# Altium PCB 175-00023, rev2, PCB, Sinistro Pwr Supply.PcbDoc (part 1 of 2)
Units mm, origin at the board's own origin, x right, y up, seen from the top; angles counter-clockwise.
Board outline 210 x 100 mm, 5 copper layers (TopLayer (*.GTL), MidLayer1 (*.G1), AGND (*.GP1), GND (*.GP2), BottomLayer (*GBL)); 99 components, 65 nets, 412 pads, 73 vias.
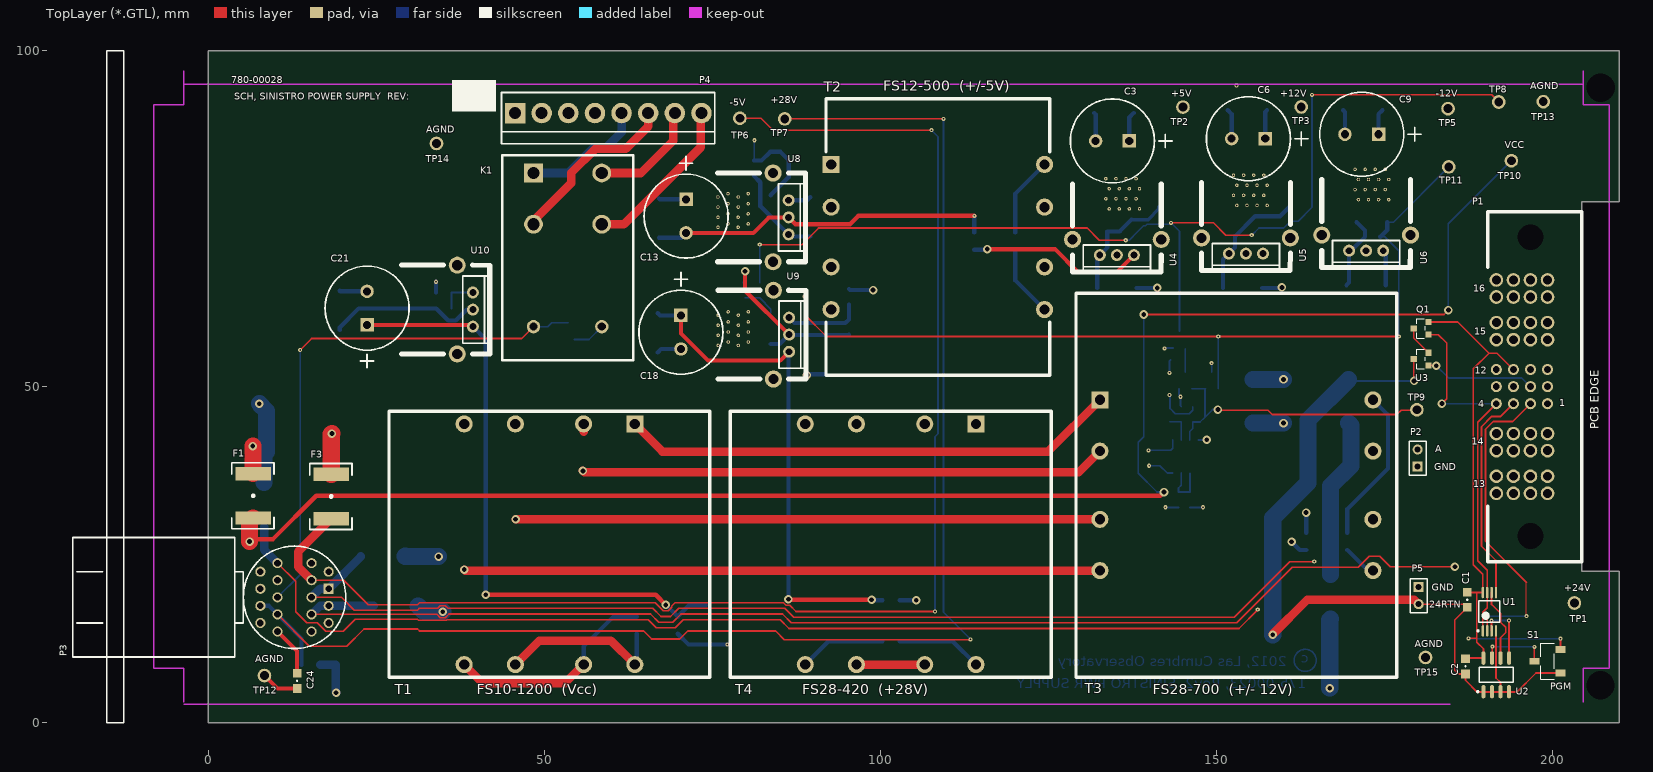
[diagram p0: TopLayer (*.GTL) view]
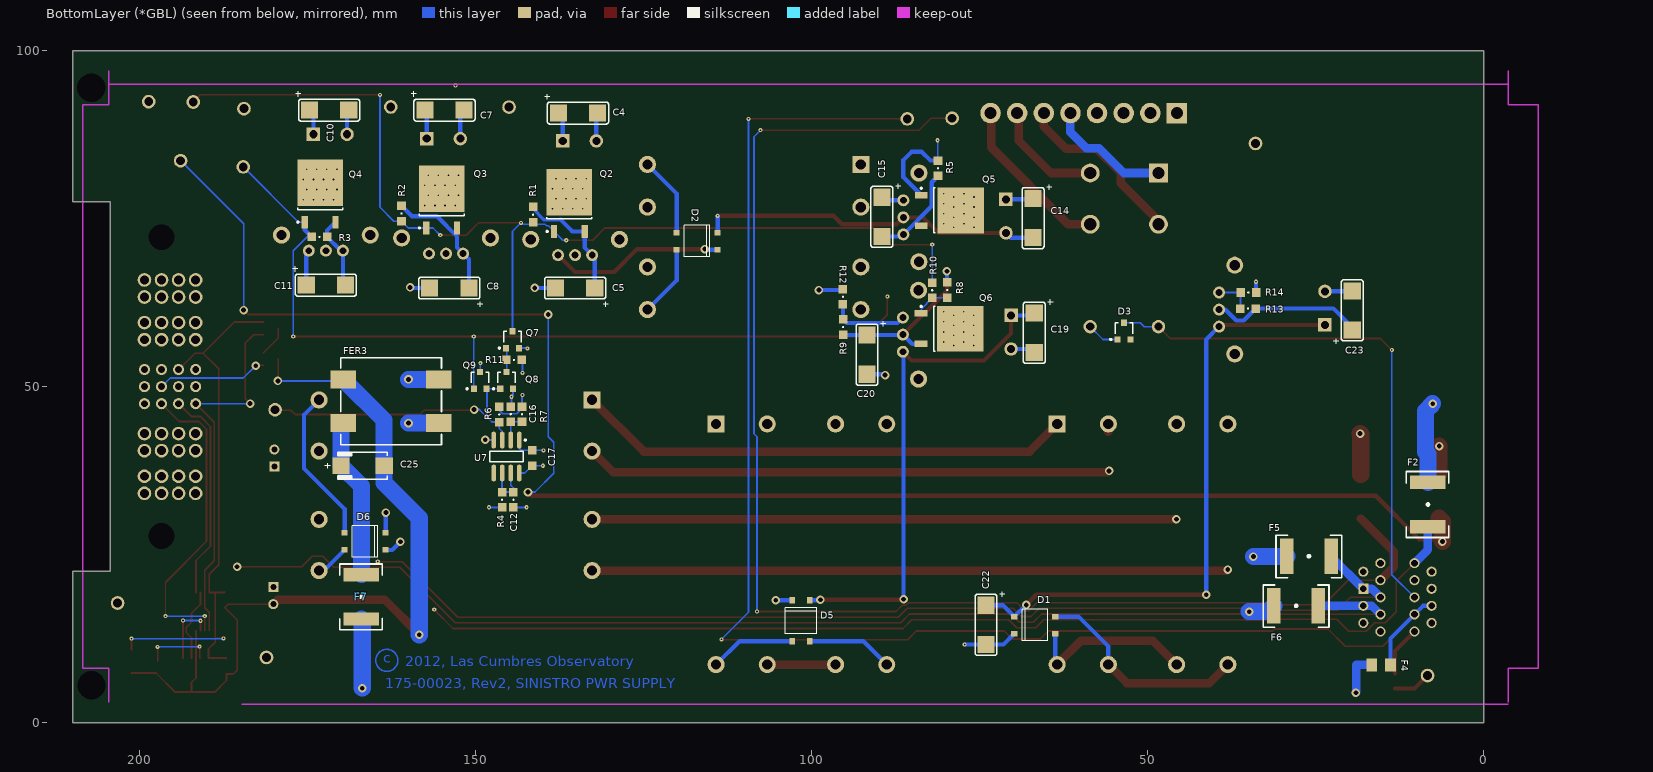
[diagram p1: BottomLayer (*GBL) view, seen from below]
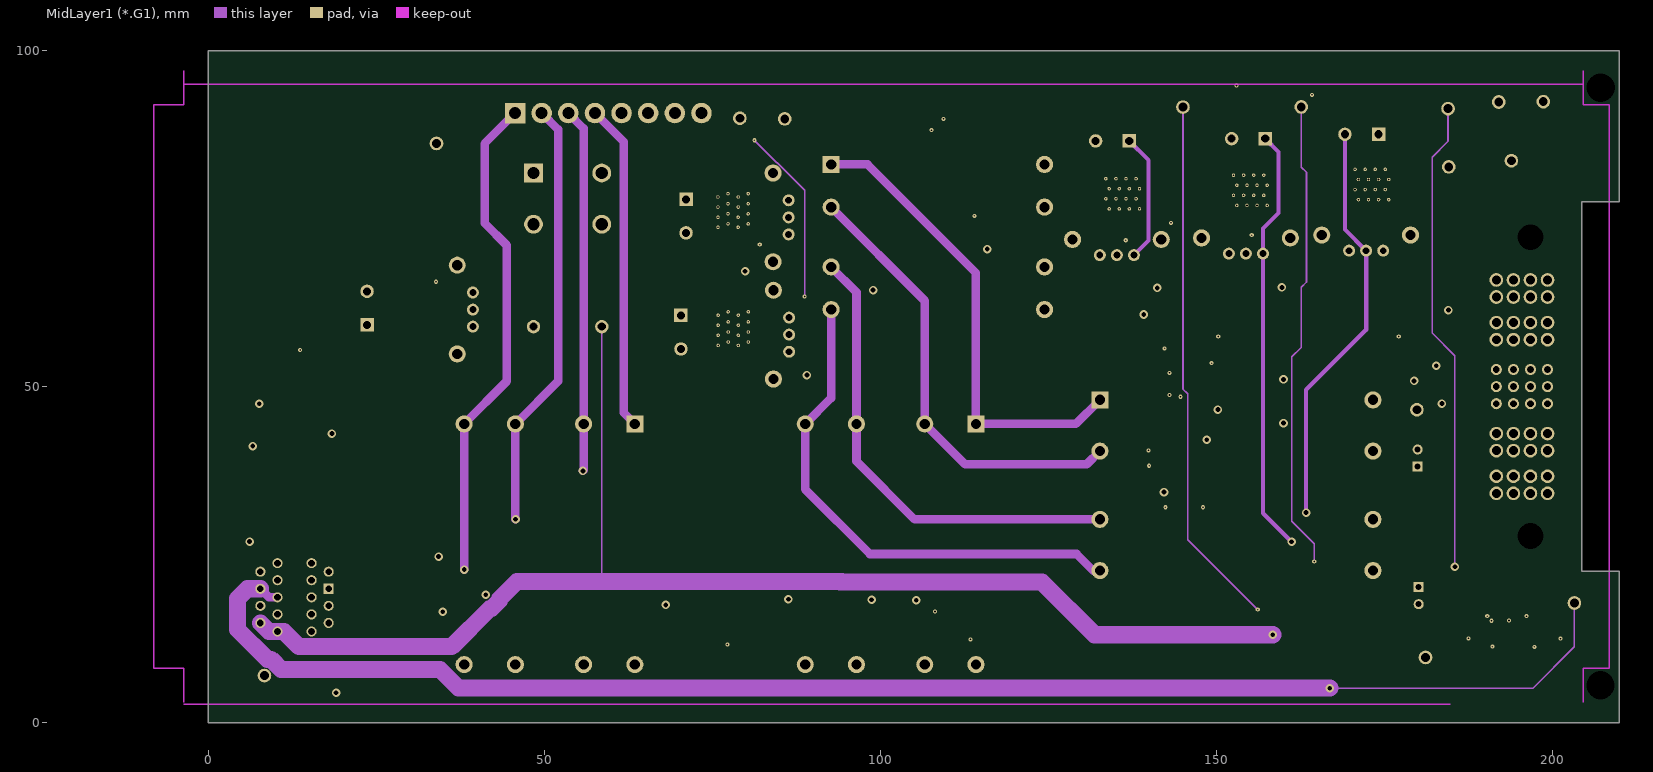
[diagram p2: MidLayer1 (*.G1)]
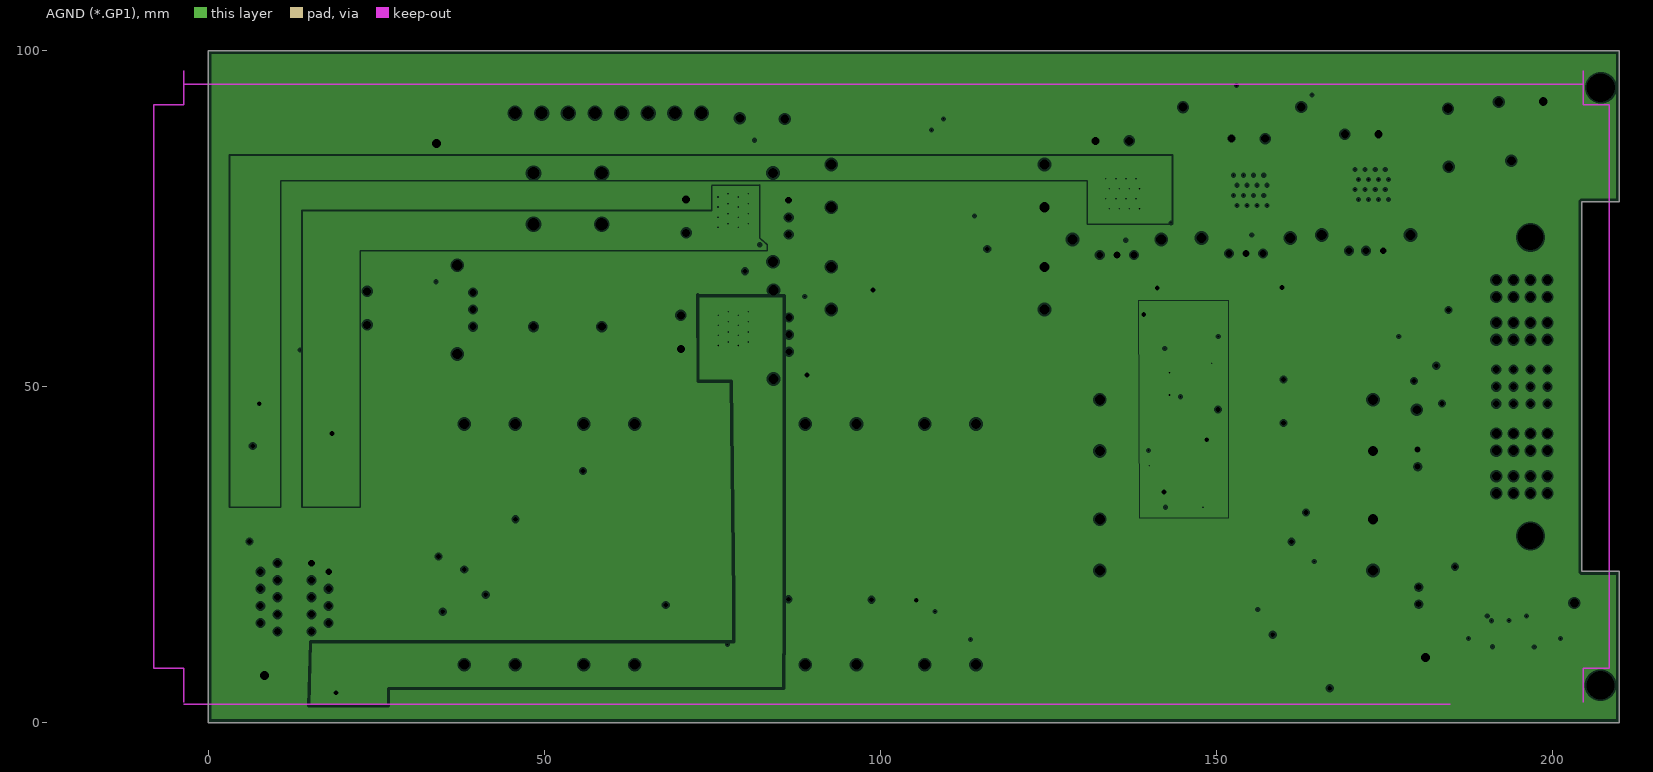
[diagram p3: AGND (*.GP1), clearances drawn from the general rule]
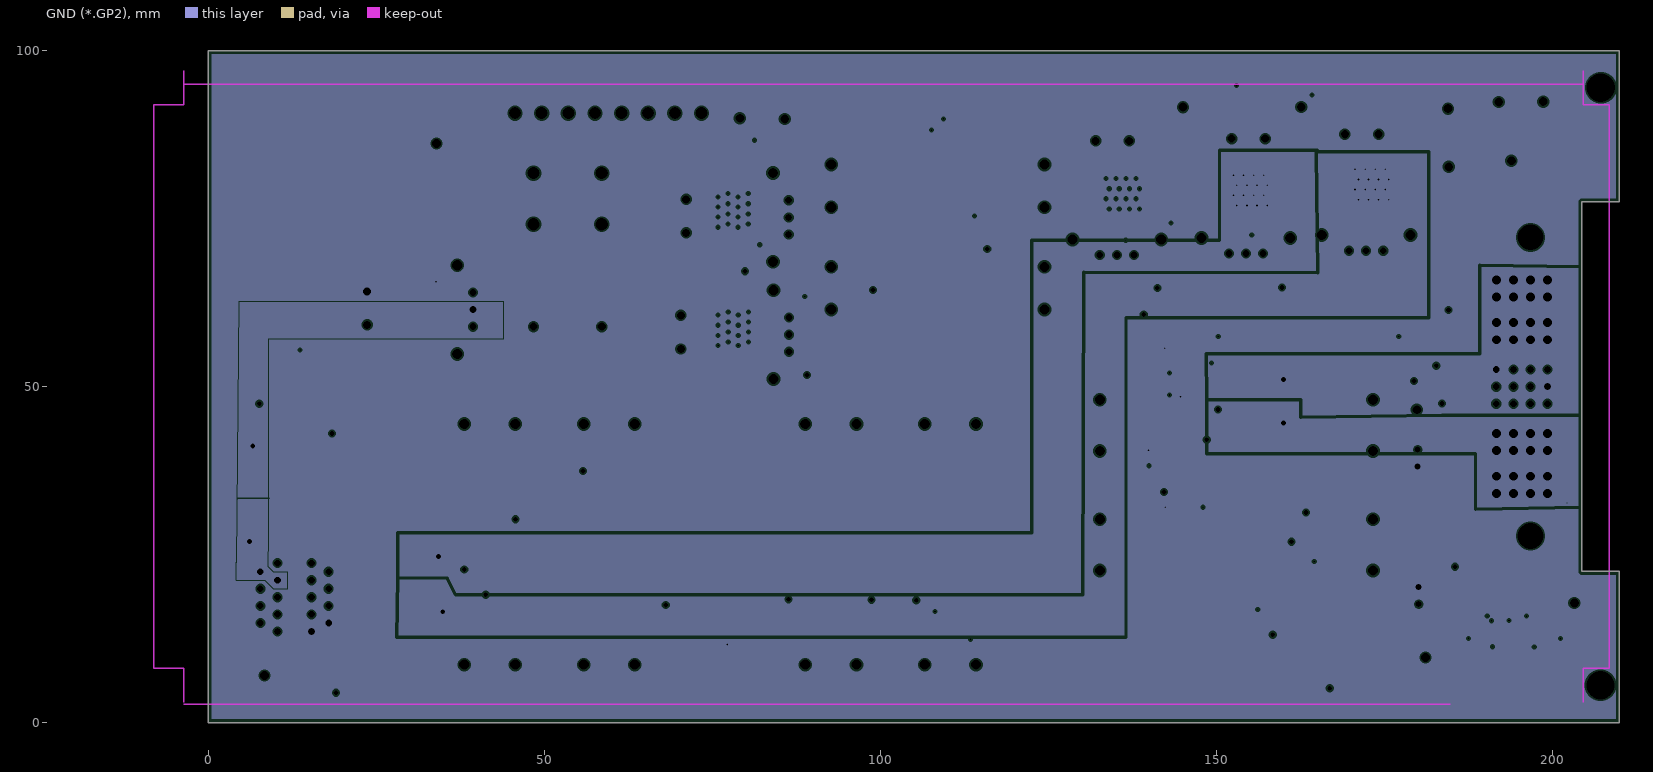
[diagram p4: GND (*.GP2), clearances drawn from the general rule]

## Layer stack, top to bottom
TopLayer (*.GTL): signal copper 0.0356
Dielectric: core 0.32, FR-4, Dk 4.8
MidLayer1 (*.G1): signal copper 0.0356
Dielectric: prepreg 0.32, FR-4, Dk 4.8
AGND (*.GP1): plane copper 0.0356, net (Multiple Nets)
Dielectric: core 0.32, FR-4, Dk 4.8
GND (*.GP2): plane copper 0.0356, net (Multiple Nets)
Dielectric: prepreg 0.32, FR-4, Dk 4.8
BottomLayer (*GBL): signal copper 0.0356

## Board outline
0,0 0,100 210,100 210,77.5 204.4,77.5 204.4,22.5 210,22.5 210,0

## Design rules (kind name [scope] priority, off if disabled: settings)
Clearance [All] p1: gap=0.127
ComponentClearance "Big Bypass Caps" [(HasFootprint('CAP, Thru Hole 12.5 mm dia'))] p1: gap=-2.54 collisioncheckmode=3 verticalgap=-2.54 showdistances=FALSE
ComponentClearance [All] p2: gap=0.254 collisioncheckmode=3 verticalgap=0.254 showdistances=FALSE
FabricationTestPointUsage TestPointUsage [All] p1: valid=0 allowmultiple=FALSE
FabricationTestpoint Testpoint [All] p1: side=3 testpointundercomponent=TRUE minsize=1.016 maxsize=2.54 preferedsize=1.524 minholesize=0.508 maxholesize=1.016 preferedholesize=0.813 testpointgrid=0.025 allowsidetop=TRUE allowsidebottom=TRUE usegrid=TRUE gridtolerance=0
PlaneClearance [All] p1: clearance=0.254
PlaneConnect "Dpak plane" [(HasFootprint('LEMO SIZE 3 18-PIN PCB') OR HasFootprint('TO-252(D-PAK)  PowerPAD'))] p1: planeconnectstyle=Direct reliefexpansion=0.508 reliefentries=4 reliefconductorwidth=0.254 reliefairgap=0.254
PlaneConnect [All] p2: planeconnectstyle=Relief reliefexpansion=0.508 reliefentries=4 reliefconductorwidth=0.254 reliefairgap=0.254
PolygonConnect [All] p1: connectstyle=Relief reliefconductorwidth=0.254 reliefentries=4 polygonreliefangle="90 Angle"
RoomDefinition "780-00028_rev2_Pg2, Sinistro Power Supply" [InComponentClass('780-00028_rev2_Pg2, Sinistro Power Supply')] p1: confinementstyle=ConfineIn formatcopy=TRUE lockcomponents=FALSE outline -48.26,-40.64 224.79,-40.64 224.79,153.67 -48.26,153.67
RoomDefinition "780-00028_rev2_Pg1, Sinistro Power Supply" [InComponentClass('780-00028_rev2_Pg1, Sinistro Power Supply')] p2: confinementstyle=ConfineIn formatcopy=TRUE lockcomponents=FALSE outline -41.91,-33.02 223.52,-33.02 223.52,148.59 -41.91,148.59
RoutingVias [All] p1: holewidth=0.711 width=1.27 viastyle="Through Hole" minholewidth=0.254 minwidth=0.61 maxholewidth=0.711 maxwidth=1.27
SilkscreenOverComponentPads [All] p1: minsilkscreentomaskgap=0.254
SolderMaskExpansion [All] p1: expansion=0.051
Width [All] p1: maxlimit=3.048 minlimit=0.178 preferedwidth=0.254
22 further rules are at their usual default settings.

## Classes and differential pairs
component class "780-00028_rev2_Pg1, Sinistro Power Supply": C1 C2 C21 C22 C23 C24 C25 D1 F1 F7 FER3 P1 P2 P3 P5 Q1 R13 R14 S1 T1 TP1 TP10 TP12 TP13 TP14 TP15 U1 U2 U3 U10
component class "780-00028_rev2_Pg2, Sinistro Power Supply": C3 C4 C5 C6 C7 C8 C9 C10 C11 C12 C13 C14 C15 C16 C17 C18 C19 C20 D2 D3 D5 D6 F2 F3 F4 F5 F6 HS1 HS2 HS3 HS4 HS5 HS6 K1 P4 Q2 Q3 Q4 Q5 Q6 Q7 Q8 Q9 R1 R2 R3 R4 R5 R6 R7 R8 R9 R10 R11 R12 T2 T3 T4 TP2 TP3 TP5 TP6 TP7 TP8 TP9 TP11 U4 U5 U6 U7 U8 U9

## Components (designator, comment, footprint, x,y, rotation, side; value= is the part's Value field where it differs from the comment)
C1 "Cap SMD" SMD_0805 187.358,18.288 r270 top
C2 "Cap SMD" SMD_0805 187.104,8.382 r270 top
C3 "10V" "CAP, Thru Hole 12.5 mm dia" 134.569,86.563 r0 top
C4 "35V" SMD_CAP_6032 134.798,90.703 r0 bottom
C5 "35V" SMD_CAP_6032 135.23,64.668 r180 bottom
C6 "25V" "CAP, Thru Hole 12.5 mm dia" 154.802,86.893 r0 top
C7 "35V" SMD_CAP_6032 154.661,91.135 r0 bottom
C8 "35V" SMD_CAP_6032 153.949,64.668 r180 bottom
C9 "25V" "CAP, Thru Hole 12.5 mm dia" 171.664,87.554 r0 top
C10 "35V" SMD_CAP_6032 171.831,91.135 r0 bottom
C11 "35V" SMD_CAP_6032 172.313,65.1 r0 bottom
C12 "1u" SMD_0805 144.399,33.172 r270 bottom
C13 "10V" "CAP, Thru Hole 12.5 mm dia" 71.12,75.376 r90 top
C14 "35V" SMD_CAP_6032 67.081,75.082 r90 bottom
C15 "35V" SMD_CAP_6032 89.586,75.26 r90 bottom
C16 "1u" smd_0805 144.805,45.898 r270 bottom
C17 "Cap SMD" SMD_0805 141.63,39.37 r270 bottom
C18 "50V" "CAP, Thru Hole 12.5 mm dia" 70.358,58.101 r90 top
C19 "35V" SMD_CAP_6032 66.904,58.014 r90 bottom
C20 "35V" SMD_CAP_6032 91.796,54.762 r90 bottom
C21 "10V" "CAP, Thru Hole 12.5 mm dia" 23.655,61.682 r270 top
C22 "35V" SMD_CAP_6032 74.092,14.554 r90 bottom
C23 "35V" SMD_CAP_6032 19.591,61.341 r270 bottom
C24 "1u" SMD_0805 13.233,6.223 r90 top
C25 "35V" SMD_CAP_7343 166.86,38.227 r0 bottom
D1 "Diode Bridge" "DIODE BRIDGE, MBS-2" 66.827,14.503 r270 bottom
D2 "Diode Bridge" "DIODE BRIDGE, MBS-2" 117.069,71.653 r90 bottom
D3 "Diode BAS16" SOT-23 53.569,58.268 r180 bottom
D5 "Diode Bridge" "DIODE BRIDGE, MBS-2" 101.625,15.164 r0 bottom
D6 "Diode Bridge" "DIODE BRIDGE, MBS-2" 166.472,26.975 r90 bottom
Designator86 "Comment" "TARGET MECHANICAL 5" -19.888,-46.355 r0 top
Designator87 "Comment" "TARGET MECHANICAL 5" -32.004,124.587 r0 top
Designator88 "Comment" "TARGET MECHANICAL 5" 216.662,124.587 r0 top
F1 "Res 0805" "SMD 2920  PolySwitch" 6.706,33.757 r90 top
F2 "Res 0805" "SMD 2920  PolySwitch" 8.331,32.461 r90 bottom
F3 "Res 0805" "SMD 2920  PolySwitch" 18.321,33.655 r90 top
F4 "Res 0805" SMD_1206 15.291,8.585 r180 bottom
F5 "Res 0805" "SMD 2920  PolySwitch" 26.035,24.765 r0 bottom
F6 "Res 0805" "SMD 2920  PolySwitch" 27.94,17.382 r0 bottom
F7 "Res 0805" "SMD 2920  PolySwitch" 167.03,18.72 r90 bottom
FER3 "ACM1513-551-2PL-TL" ACM1513-551-2PL 162.611,47.828 r0 bottom
K1 "G4W-2212P" "RELAY OMRON G4W-2212P" 48.42,81.788 r90 top
P1 "PETC-02-12-02--01-S-RA-SD" PETC-02-12-02-01-RA 195.5,50 r0 top locked
P2 "Header 2" HDR1X2 179.984,38.1 r90 top
P3 "LEMO 3S 18p RT PCB" "LEMO SIZE 3 18-PIN PCB" 12.86,18.652 r180 top
P4 "Header 8 0.156\"" "HDR 1X8 0.156\"" 45.677,90.705 r0 top
P5 "Header 2" HDR1X2 180.137,20.168 r270 top
Q1 "FDV304P" SMD_SOT23_3 180.5,58.674 r90 top
Q2 "I" "TO-252(D-PAK)  PowerPAD" 136.087,77.451 r90 bottom
Q3 "I" "TO-252(D-PAK)  PowerPAD" 155.083,77.962 r90 bottom
Q4 "STD30NF03L" "TO-252(D-PAK)  PowerPAD" 173.169,78.826 r90 bottom
Q5 "STD30NF03L" "TO-252(D-PAK)  PowerPAD" 79.368,76.216 r180 bottom
Q6 "I" "TO-252(D-PAK)  PowerPAD" 79.392,58.634 r180 bottom
Q7 "ZXMN3B14FTA" SOT-23B 144.549,56.985 r180 bottom
Q8 "ZXMN3B14FTA" SOT-23B 145.415,50.927 r180 bottom
Q9 "MOSFET-P" SOT-23B 149.352,50.927 r180 bottom
R1 "Res 0805" SMD_0805 141.478,75.59 r90 bottom
R2 "Res 0805" SMD_0805 161.061,75.768 r90 bottom
R3 "Res 0805" SMD_0805 173.279,72.288 r0 bottom
R4 "Res 0805" SMD_0805 146.101,33.172 r90 bottom
R5 "Res 0805" SMD_0805 81.229,82.499 r90 bottom
R6 "Res 0805" SMD_0805 146.507,45.872 r270 bottom
R7 "Res 0805" SMD_0805 143.129,45.898 r90 bottom
R8 "Res 0805" SMD_0805 79.858,64.364 r90 bottom
R9 "Res 0805" SMD_0805 95.352,58.852 r270 bottom
R10 "Res 0805" SMD_0805 82.092,64.338 r270 bottom
R11 "Res 0805" SMD_0805 144.34,53.975 r180 bottom
R12 "Res 0805" SMD_0805 95.377,63.373 r270 bottom
R13 "Res 0805" SMD_0805 35.088,61.62 r180 bottom
R14 "Res 0805" SMD_0805 35.052,64.008 r0 bottom
S1 "CJS-1200TB" CAS-120B 199.296,9.144 r90 top
T1 "12 VA" "XFRMR TRIAD FS10-1200 (12VA)" 50.8,26.543 r270 top locked
T2 "6VA" "XFRMR TRIAD FS10-600 (6 VA)" 108.585,72.263 r0 top locked
T3 "20VA" "XFRMR TRIAD FS28-700 (20VA)" 153.017,35.331 r0 top locked
T4 "12 VA" "XFRMR TRIAD FS10-1200 (12VA)" 101.56,26.543 r270 top locked
TP1 "Test point" PAD_80D_052H 203.302,17.805 r90 top
TP2 "Test point" PAD_80D_052H 145.059,91.592 r90 top
TP3 "Test point" PAD_80D_052H 162.662,91.618 r90 top
TP5 "Test point" PAD_80D_052H 184.506,91.364 r90 top
TP6 "Test point" PAD_80D_052H 79.121,89.941 r90 top
TP7 "Test point" PAD_80D_052H 85.801,89.84 r90 top
TP8 "Test point" PAD_80D_052H 192.049,92.354 r90 top
TP9 "Test point" PAD_80D_052H 179.865,46.558 r90 top
TP10 "Test point" PAD_80D_052H 193.929,83.617 r90 top
TP11 "Test point" PAD_80D_052H 184.607,82.702 r90 top
TP12 "Test point" PAD_80D_052H 8.382,7.01 r90 top
TP13 "Test point" PAD_80D_052H 198.679,92.405 r90 top
TP14 "Test point" PAD_80D_052H 33.985,86.182 r90 top
TP15 "Test point" PAD_80D_052H 181.153,9.703 r90 top
U1 "SN74CBT3306PWLE" PW008_N 190.66,16.51 r90 top
U2 "M24C32RMN1" SOP8_N 191.676,7.112 r90 top
U3 "DS2411" SMD_SOT23_3 180.5,54.102 r90 top
U4 "Voltage Reg, Pos Fixed" "TO-220 w/Heatsink 7136DG" 135.23,67.071 r0 top
U5 "Voltage Reg, Pos Fixed" "TO-220 w/Heatsink 7136DG" 154.432,67.299 r0 top
U6 "Voltage Reg, Neg Fixed" "TO-220 w/Heatsink 7136DG" 172.314,67.731 r0 top
U7 "LM555CMX" M08A_M 145.44,39.599 r270 bottom
U8 "Voltage Reg, Neg Fixed" "TO-220 w/Heatsink 7136DG" 88.885,75.184 r90 top
U9 "LM350T" "TO-220 w/Heatsink 7136DG" 88.95,57.734 r90 top
U10 "LM350T" "TO-220 w/Heatsink 7136DG" 41.903,61.468 r90 top

## Footprints (in the part's own frame and the unit in brackets; to place one, negate y for a bottom-side part, rotate by r counter-clockwise, add the part's x,y. Pads: shape width x height; smd on the part's side, far side on the other; paste and mask are expansions set on the pad)
ACM1513-551-2PL [mil] "TDK Power Line Common Mode Filter, 10A"
  rect 150x106 smd: 1(-280,128) 2(-280,-128) 3(280,-128) 4(280,128)
  silkscreen extent -295,-255 295,255
"CAP, Thru Hole 12.5 mm dia" [mm]
  rect 2x2 hole 1.2: 1(2.5,0)
  round 2 hole 1.2: 2(-2.5,0)
  silkscreen extent -6.25,-6.25 8.87,6.25
CAS-120B [mm] "Copal Electronics CAS SMD Slide Switch"
  rect 1x1.5 smd: 1(-1.75,-1.95) 2(0,1.95) 3(1.75,-1.95)
  silkscreen extent -2.69,-1 2.69,1
"DIODE BRIDGE, MBS-2" [mm] "SMD DIODE BRIDGE"
  rect 0.82x0.92 smd: 1(-1.275,-3.05) 2(1.275,-3.05) 3(1.275,3.05) 4(-1.275,3.05)
  silkscreen extent -2.35,-1.9 2.35,1.9
HDR1X2 [mm] "Connector; Header; 2 Position"
  rect 1.5x1.5 hole 0.9: 1(0,0)
  round 1.5 hole 0.9: 2(2.54,0)
  silkscreen extent -1.27,-1.27 3.81,1.27
"HDR 1X8 0.156\"" [mil] "Connector; Header; 8 Position"
  rect 120x120 hole 70: 1(0,0)
  round 120 hole 70: 2(156,0) 3(312,0) 4(468,0) 5(624,0) 6(780,0) 7(936,0) 8(1092,0)
  silkscreen extent -80,-180 1170,120
"LEMO SIZE 3 18-PIN PCB" [mm]
  rect 1.5x1.5 hole 1: 1(-5.08,-1.27)
  round 1.5 hole 1: 2(-5.08,-3.81) 3(-2.54,-5.08) 4(2.54,-5.08) 5(5.08,-3.81) 6(5.08,-1.27) 7(5.08,1.27) 8(5.08,3.81) 9(2.54,5.08) 10(-2.54,5.08) 11(-5.08,3.81) 12(-5.08,1.27) 13(-2.54,0) 14(-2.54,-2.54) 15(2.54,-2.54) 16(2.54,0) 17(2.54,2.54) 18(-2.54,2.54)
  silkscreen extent -7.62,-8.89 33.02,8.89
M08A_M [mm] "SOIC, 8-Leads, Body 4.9x3.9mm, Pitch 1.27mm, IPC Low Density"
  oval 2.5x0.7 smd: 1(-2.45,1.905) 2(-2.45,0.635) 3(-2.45,-0.635) 4(-2.45,-1.905) 5(2.45,-1.905) 6(2.45,-0.635) 7(2.45,0.635) 8(2.45,1.905)
  silkscreen extent -2.57,-2.5 0.8,2.93, body extent -2,-2.5 2,2.5, height 1.75
PAD_80D_052H [mil]
  round 80 hole 52: 1(0,0)
PETC-02-12-02-01-RA [mil] "Samtec Male Pins, PWR(4), Signal(12), Right Angle"
  round 59.06 hole 150 unplated: 0(50,-875) 0(50,875)
  round 65 hole 40: 1(150,-100) 2(50,-100) 3(-50,-100) 4(-150,-100) 5(150,0) 6(50,0) 7(-50,0) 8(-150,0) 9(150,100) 10(50,100) 11(-50,100) 12(-150,100)
  round 80 hole 52: 13(-150,-625) 13(-150,-525) 13(-50,-625) 13(-50,-525) 13(50,-625) 13(50,-525) 13(150,-625) 13(150,-525) 14(-150,-375) 14(-150,-275) 14(-50,-375) 14(-50,-275) 14(50,-375) 14(50,-275) 14(150,-375) 14(150,-275) 15(-150,275) 15(-150,375) 15(-50,275) 15(-50,375) 15(50,275) 15(50,375) 15(150,275) 15(150,375) 16(-150,525) 16(-150,625) 16(-50,525) 16(-50,625) 16(50,525) 16(50,625) 16(150,525) 16(150,625)
  silkscreen extent -200,-1025 350,1025
PW008_N [mm] "SOP, 8-Leads, Body 3x4.4mm, Pitch 0.65mm, IPC Medium Density"
  oval 1.7x0.35 smd: 1(-2.85,0.975) 2(-2.85,0.325) 3(-2.85,-0.325) 4(-2.85,-0.975) 5(2.85,-0.975) 6(2.85,-0.325) 7(2.85,0.325) 8(2.85,0.975)
  silkscreen extent -2.97,-1.55 1.6,1.82, body extent -2.25,-1.55 2.25,1.55, height 3.1
"RELAY OMRON G4W-2212P" [mm] "OMRON AC SWITCHING RELAY"
  rect 2.8x2.8 hole 1.8: 1(0,0)
  round 2.8 hole 1.8: 2(0,-10.16) 3(-7.62,0) 4(-7.62,-10.16)
  round 2 hole 1.2: 5(-22.86,0) 6(-22.86,-10.16)
  silkscreen extent -27.86,-14.83 2.64,4.67
"SMD 2920  PolySwitch" [mm] "Use with SMD polyswitch fuse"
  rect 2x5.3 smd: 1(3.3,0) 2(-3.3,0)
  silkscreen extent -4.9,-3.1 4.9,3.2
SMD_0805 [mil]
  rect 50x50 smd: 1(-45,0) 2(45,0)
  silkscreen extent -1,-1 1,1
smd_0805 [mil] "Chip Resistor; Body 2.0 x 1.3 mm (LxW typ)"
  rect 50x50 smd: 1(-45,0) 2(45,0)
  silkscreen extent -1,-1 1,1
SMD_1206 [mil]
  rect 63x75 smd: 1(-55,0) 2(55,0)
SMD_CAP_6032 [mil]
  rect 100x100 smd: NEG(-115,0) POS(115,0)
  silkscreen extent -179,-110 195,64
SMD_CAP_7343 [mil]
  rect 102x94 smd: NEG(-126,0) POS(126,0)
  silkscreen extent -145,-80 220,80
SMD_SOT23_3 [mil]
  rect 36x36 smd: 1(-37,-43) 2(37,-43) 3(0,43)
  silkscreen extent -57,-25 57,25
SOP8_N [mm] "SOIC, 8-Leads, Body 4.9x3.9mm, Pitch 1.27mm, IPC Medium Density"
  oval 2x0.6 smd: 1(-2.5,1.905) 2(-2.5,0.635) 3(-2.5,-0.635) 4(-2.5,-1.905) 5(2.5,-1.905) 6(2.5,-0.635) 7(2.5,0.635) 8(2.5,1.905)
  silkscreen extent -2.62,-2.5 1.1,2.88, body extent -2,-2.5 2,2.5, height 1.75
SOT-23 [mm] "SOT-23; 3 Leads; Body 3.0 x 2.6 mm, inc. leads (LxW max)"
  rect 0.9x0.95 smd: 1(-0.95,-1.25) 2(0.95,-1.25) 3(0,1.25)
  silkscreen extent -2.08,-1.37 1.3,1.25
SOT-23B [mm] "SOT-23; 3 Leads; Body 3.0 x 2.6 mm, inc. leads (LxW max)"
  rect 0.9x0.95 smd: 1(-0.95,-1.25) 2(0.95,-1.25) 3(0,1.25)
  silkscreen extent -2.08,-1.37 1.3,1.25
"TARGET MECHANICAL 5" [mm]
"TO-220 w/Heatsink 7136DG" [mil]
  round 100 hole 60: 0(-260,190) 0(260,190)
  round 70 hole 40: 1(100,98.43) 2(0,98.43) 3(-100,98.43)
  silkscreen extent -260,0 260,515
"TO-252(D-PAK)  PowerPAD" [mil] "D-PAK, 3-Pads, Body 6.2x6.7mm (max), IPC Medium Density"
  rect 74.8x37.4 smd: 1(-171.26,89.76) 3(-171.26,-89.76)
  round 20 hole 10: 2(-39.37,-19.69) 2(-39.37,98.43) 2(-39.37,-78.74) 2(-39.37,39.37) 2(19.68,-98.43) 2(19.68,-39.37) 2(19.68,19.68) 2(19.68,78.74) 2(78.74,-19.69) 2(78.74,98.43) 2(78.74,-78.74) 2(78.74,39.37) 2(137.8,78.74) 2(137.8,-98.43) 2(137.8,-39.37) 2(137.8,19.68)
  rect 271.65x267.72 smd: 2(59.06,0)
  silkscreen extent -176,-132 -88,135, body extent -98,-132 146,132, height 94
"XFRMR TRIAD FS10-600 (6 VA)" [mil] "TRANSFORMER, 6VA, 5V @ 1.2 A"
  rect 100x100 hole 60: 1(-625,425)
  round 100 hole 60: 2(-625,175) 3(-625,-175) 4(-625,-425) 5(625,425) 6(625,175) 7(625,-175) 8(625,-425)
  silkscreen extent -655,-810 655,810
"XFRMR TRIAD FS10-1200 (12VA)" [mil] "TRANSFORMER, 12 VA, 5V @ 2.4A"
  rect 100x100 hole 60: 1(-705,500)
  round 100 hole 60: 2(-705,200) 3(-705,-200) 4(-705,-500) 5(705,500) 6(705,200) 7(705,-200) 8(705,-500)
  silkscreen extent -780,-940 780,940
"XFRMR TRIAD FS28-700 (20VA)" [mil] "TRANSFORMER, 20VA 28VCT @ 0.7A"
  rect 100x100 hole 60: 1(-800,500)
  round 100 hole 60: 2(-800,200) 3(-800,-200) 4(-800,-500) 5(800,500) 6(800,200) 7(800,-200) 8(800,-500)
  silkscreen extent -940,-1125 940,1125

## Part data
C1 C2 C17: "Capacitor"
C3 C6 C9 C13 C18 C21: library part "Cap Elec, 330 uF, 35V", "Radial Thru hole"
C4 C5 C7 C8 C10 C11 C14 C15 C19 C20 C22 C23 C25: library part "Cap Tant 35V", "outline 6.0mm x 3.2mm"
C12 C16 C24: library part Cap, "Capacitor"
D1 D2 D5 D6: "Full Wave Diode Bridge"
D3: "Silicon Switching Diode for High-Speed Switching"
F1 F2 F3 F4 F5 F6 F7: library part "Fuse Resettable", "Polyswitch"
FER3: library part "Trans Ideal", "Transformer (Ideal)"
K1: library part "Relay 240V, 2 FORM A, DPST", "Omron G4W DPST Non-Latching"
P1: "SAMTEC, SIGNAL(12)+PWR(4)"
P2 P5: "Header, 2-Pin"
P3: library part "LEMO 18 pin PCB RT", "LEMO S3 18p RT"
P4: "Header, 6-Pin"
Q1: "P-MOSFET LOGIC LEVEL"
Q2 Q3 Q6: library part IRF5303P, "P-Chan MOSFET"
Q4 Q5: "N-Chan MOSFET"
Q7 Q8: library part MOSFET-N, "N-Channel MOSFET"
Q9: "P-Channel MOSFET"
R1 R2 R3 R4 R5 R6 R7 R8 R9 R10 R11 R12 R13 R14: library part "Res SMD", "Resistor 0805"
S1: library part SW_SPDT_DOUG
T1 T4: library part "XFRMR, 120/240, 12 VA", "TRIAD FS10-1200"
T2: library part "XFRMR, 120/240, 12 VA", "TRIAD FS12-500"
T3: library part "XFRMR, 120/240, 12 VA", "TRIAD FS28-700"
TP1 TP2 TP3 TP5 TP6 TP7 TP8 TP9 TP10 TP11 TP12 TP13 TP14 TP15: "Test Point"
U1: "Dual FET Bus Switch"
U2: "32 Kbit Serial I²C Bus EEPROM"
U3: "Silicon Serial Number"
U4 U5: "7805A"
U6 U8: "79xx"
U7: "Timer"
U9 U10: "3-Amp Adjustable Regulator"

## Free pads (board coordinates)
  round 4 hole 4.22 unplated: 2(207.195,5.563) 2(207.25,94.463)

## Via types
v1: diameter 0.61, hole 0.254, TopLayer (*.GTL) to BottomLayer (*GBL), 37 vias
v2: diameter 1.27, hole 0.711, TopLayer (*.GTL) to BottomLayer (*GBL), 36 vias

## Nets (pads, with @x,y where several pads share a name; then routed paths per layer and width w, separated by ;. In a path a pad name is that pad's centre, name@x,y a point inside that pad or via, vN(x,y) a via of type N, cw(c..) or ccw(c..) an arc to the next point about the centre after c; other vN are vias at no path point)
24RTN: C1.2 C2.2 C24.2 C25.NEG D3.1 FER3.3 K1.6 P3.8 P3.9 P5.2 S1.1 U1.4 U2.1 U2.2 U2.3 U2.4 U3.3 | length 335.2
  TopLayer (*.GTL) w0.254: v2(158.42,13.081) v2@158.42,13.157 ; U3.3@179.408,54.102 179.408,50.894 v2(179.451,50.851) ; P5.2@180.137,17.628 186.875,17.628 C1.2@187.358,17.145 185.496,15.283 185.496,7.823 186.08,7.239 C2.2@187.104,7.239 187.104,6.317 188.874,4.547 U2.3@192.311,4.547 ; U1.4@191.635,13.66 191.651,13.644 191.651,6.647 192.311,5.987 U2.3@192.311,4.612 U2.3@192.311,4.547 ; S1.1@201.246,7.394 197.589,7.394 194.742,4.547 U2.3@192.311,4.547
  TopLayer (*.GTL) w0.635: P3.9@10.32,13.572 13.233,10.659 C24.2@13.233,7.366
  TopLayer (*.GTL) w1.27: v2@158.42,13.157 163.525,18.263 179.502,18.263 P5.2@180.137,17.628
  MidLayer1 (*.G1) w0.254: 58.58,21.481 K1.6@58.58,58.928
  MidLayer1 (*.G1) w2.54: P3.8@7.78,14.842 9.05,13.572 P3.9@10.32,13.572 11.269,13.572 13.538,11.303 36.246,11.303 41.935,16.993 42.167,16.993 43.358,18.183 43.358,18.415 45.949,21.006 94.312,21.006 ; 94.005,20.904 124.104,20.904 131.928,13.081 v2(158.42,13.081)
  BottomLayer (*GBL) w0.254: D3.1@54.519,57.018 56.67,57.018 K1.6@58.58,58.928 ; FER3.3@169.723,51.079 169.951,50.851 v2(179.451,50.851)
  BottomLayer (*GBL) w2.54: v2(158.42,13.081) 158.42,30.455 163.659,35.694 C25.NEG@163.659,38.227 163.659,45.016 FER3.3@169.723,51.079
+3.3V_BKPL: C1.1 C2.1 P1.11 Q1.2 S1.3 U1.8 U2.8 | length 84.5
  TopLayer (*.GTL) w0.254: Q1.2@181.592,59.614 185.961,59.614 190.596,54.978 ; C2.1@187.104,9.525 187.191,9.612 U2.8@189.771,9.612 189.771,10.998 188.78,11.989 188.78,12.548 ; C1.1@187.358,19.431 187.429,19.36 188.78,19.36 ; v1(187.536,12.548) 188.78,12.548 ; P1.11@194.23,52.54 191.792,54.978 190.596,54.978 ; v1(201.226,12.497) 201.246,12.477 S1.3@201.246,10.894 ; 188.78,12.548 188.78,19.36 ; 188.78,19.36 U1.8@189.685,19.36 189.685,22.082 188.272,23.495 188.272,52.654 190.596,54.978
  BottomLayer (*GBL) w0.254: v1(187.536,12.548) 187.587,12.497 v1(201.226,12.497)
+5V: F2.2 P3.4 TP2.1 | length 241.9
  TopLayer (*.GTL) w0.254: P3.4@10.32,23.732 13.03,21.022 13.03,16.51 14.656,14.884 16.256,14.884 17.526,13.614 20.1,13.614 21.878,15.392 31.166,15.392 31.318,15.24 35.451,15.24 35.54,15.329 65.481,15.329 66.688,14.122 69.507,14.122 70.714,15.329 85.124,15.329 86.432,14.021 153.391,14.021 v1(156.185,16.815)
  MidLayer1 (*.G1) w0.254: TP2.1@145.059,91.592 145.059,49.632 145.771,48.92 145.771,27.229 v1(156.185,16.815)
  BottomLayer (*GBL) w1.27: F2.2@8.331,29.161 8.331,25.721 P3.4@10.32,23.732
+12V: F5.2 P3.1 P3.13 TP3.1 | length 235.5
  TopLayer (*.GTL) w0.254: P3.13@15.4,18.652 19.854,18.652 21.768,16.739 31.166,16.739 31.433,17.005 34.163,17.005 34.557,17.399 35.293,17.399 35.687,17.005 66.175,17.005 67.382,15.799 68.813,15.799 70.019,17.005 85.818,17.005 87.126,15.697 152.696,15.697 160.951,23.952 v1@164.592,23.952
  MidLayer1 (*.G1) w0.254: TP3.1@162.662,91.618 162.662,82.671 163.449,81.883 163.449,65.564 162.662,64.776 162.662,55.829 161.265,54.432 161.265,29.972 164.592,26.645 v1(164.592,23.978)
  BottomLayer (*GBL) w1.27: P3.13@15.4,18.652 16.67,19.922 P3.1@17.94,19.922 22.735,24.717 F5.2@22.735,24.765
+24V: D3.3 F7.2 K1.5 P3.6 P3.16 TP1.1 | length 313.3
  TopLayer (*.GTL) w0.254: v1(13.691,55.448) 15.392,57.15 46.642,57.15 K1.5@48.42,58.928
  MidLayer1 (*.G1) w0.254: v2(166.903,5.131) 197.155,5.131 203.302,11.278 TP1.1@203.302,17.805
  MidLayer1 (*.G1) w1.27: P3.6@7.78,19.922 9.05,18.652 P3.16@10.32,18.652
  MidLayer1 (*.G1) w2.54: P3.6@7.78,19.922 5.876,19.922 4.394,18.44 4.394,13.868 8.839,9.423 9.381,9.423 10.88,7.925 34.493,7.925 37.262,5.156 166.878,5.156 v2(166.903,5.131)
  BottomLayer (*GBL) w0.254: P3.16@10.32,18.652 13.691,22.023 v1(13.691,55.448) ; K1.5@48.42,58.928 50.549,58.928 51.138,59.518 D3.3@53.569,59.518
  BottomLayer (*GBL) w2.54: v2(166.903,5.131) 166.903,15.293 F7.2@167.03,15.42
+28V: F4.2 P3.7 P3.17 TP7.1 | length 222.7
  TopLayer (*.GTL) w0.254: P3.17@10.32,16.112 15.053,11.379 20.625,11.379 23.19,13.945 31.166,13.945 31.458,13.652 64.787,13.652 65.993,12.446 70.202,12.446 71.408,13.652 84.43,13.652 85.738,12.344 v1@113.436,12.344 ; TP7.1@85.801,89.84 v1(109.423,89.84)
  BottomLayer (*GBL) w0.254: v1(109.423,89.84) 109.423,16.408 v1(113.436,12.395) v1@113.436,12.319
  BottomLayer (*GBL) w0.635: P3.7@7.78,17.382 9.05,17.382 P3.17@10.32,16.112 13.894,12.538 F4.2@13.894,8.585
-5V: F3.2 P3.14 TP6.1 | length 209.5
  TopLayer (*.GTL) w0.254: P3.14@15.4,21.192 20.21,21.192 23.851,17.551 31.166,17.551 31.458,17.843 66.523,17.843 67.729,16.637 68.466,16.637 68.986,17.158 68.986,17.352 69.477,17.843 85.623,17.843 85.992,17.475 86.534,17.475 87.474,16.535 v1(108.153,16.535) ; TP6.1@79.121,89.941 82.271,89.941 84.049,88.163 v1(107.645,88.163)
  TopLayer (*.GTL) w1.27: P3.14@15.4,21.192 13.411,23.181 13.411,25.445 F3.2@18.321,30.355
  BottomLayer (*GBL) w0.254: v1(107.645,88.163) 108.61,87.198 108.61,43.002 108.153,42.545 v1(108.153,16.535)
-12V: F6.2 P3.12 P3.18 TP5.1 | length 257.2
  TopLayer (*.GTL) w0.254: P3.18@15.4,16.112 34.066,16.112 34.557,15.621 35.293,15.621 35.839,16.167 65.828,16.167 67.035,14.961 69.16,14.961 70.367,16.167 85.471,16.167 86.779,14.859 153.044,14.859 161.299,23.114 171.145,23.114 172.796,24.765 174.32,24.765 175.895,23.19 v2(185.522,23.19)
  MidLayer1 (*.G1) w0.254: TP5.1@184.506,91.364 184.506,86.512 182.143,84.15 182.143,57.988 185.522,54.61 v2(185.522,23.19)
  BottomLayer (*GBL) w1.27: P3.18@15.4,16.112 16.67,17.382 P3.12@17.94,17.382 F6.2@24.64,17.382
A: C3.2 C4.NEG C5.NEG C6.2 C7.NEG C8.NEG C9.1 C10.POS C11.POS C13.1 C14.POS C15.POS C18.2 C19.NEG C20.NEG C24.1 D5.2 P2.2 P3.2 P3.3 R12.1 T2.6 T2.7 T3.6 T3.7 TP12.1 TP13.1 TP14.1 TP15.1 U4.2 U5.2 U6.1 U8.1 | length 49.5
  TopLayer (*.GTL) w0.635: TP12.1@8.382,7.01 10.312,5.08 C24.1@13.233,5.08
  BottomLayer (*GBL) w0.635: C19.NEG@66.904,55.093 67.412,55.601 C18.2@70.358,55.601 ; C14.POS@67.081,78.003 67.208,77.876 C13.1@71.12,77.876 ; U8.1@86.385,77.724 89.129,77.724 C15.POS@89.586,78.181 ; v2(89.103,51.714) 89.23,51.841 C20.NEG@91.796,51.841 ; R12.1@95.377,64.516 95.529,64.364 v2(98.958,64.364) ; D5.2@102.9,18.214 105.357,18.214 v2(105.359,18.212) ; C4.NEG@131.877,90.703 132.069,90.511 C3.2@132.069,86.563 ; C5.NEG@138.151,64.668 141.224,64.668 v2(141.249,64.694) ; C7.NEG@151.74,91.135 152.302,90.573 C6.2@152.302,86.893 ; C8.NEG@156.87,64.668 159.69,64.668 v2(159.791,64.77) ; C9.1@174.164,87.554 174.164,90.547 C10.POS@174.752,91.135 ; U6.1@174.854,70.231 175.234,69.85 C11.POS@175.234,65.1
AA: P4.4 T1.1 T2.1 T3.1 T4.1 | length 193.4
  TopLayer (*.GTL) w1.27: T1.1@63.5,44.45 67.615,40.335 125.001,40.335 T3.1@132.697,48.031
  MidLayer1 (*.G1) w1.27: P4.4@57.564,90.705 61.864,86.405 61.864,46.086 T1.1@63.5,44.45 ; T2.1@92.71,83.058 98.12,83.058 114.26,66.918 T4.1@114.26,44.45 129.116,44.45 T3.1@132.697,48.031
BB: P4.2 T1.3 T2.3 T3.3 T4.3 | length 221.3
  TopLayer (*.GTL) w1.27: v2(45.745,30.277) 59.893,30.277 59.919,30.251 T3.3@132.697,30.251
  MidLayer1 (*.G1) w1.27: v2(45.745,30.277) 45.72,30.302 T1.3@45.72,44.45 52.07,50.8 52.07,88.274 P4.2@49.639,90.705 ; T2.3@92.71,67.818 96.48,64.048 T4.3@96.48,44.45 96.48,38.902 105.131,30.251 T3.3@132.697,30.251
CC: P4.3 T1.2 T2.2 T3.2 T4.2 | length 201.1
  TopLayer (*.GTL) w1.27: v2(55.778,37.465) 56.007,37.236 129.522,37.236 T3.2@132.697,40.411 ; T1.2@55.88,43.307 T1.2@55.88,44.45
  MidLayer1 (*.G1) w1.27: P4.3@53.602,90.705 55.88,88.427 T1.2@55.88,44.45 55.88,37.567 v2(55.778,37.465) ; T2.2@92.71,76.708 106.64,62.778 T4.2@106.64,44.45 112.634,38.456 130.741,38.456 T3.2@132.697,40.411
DD: P4.1 T1.4 T2.4 T3.4 T4.4 | length 246.5
  TopLayer (*.GTL) w1.27: v2(38.125,22.784) 38.278,22.631 60.757,22.631 ; 59.919,22.631 60.757,22.631 ; T3.4@132.697,22.631 60.757,22.631
  MidLayer1 (*.G1) w1.27: v2(38.125,22.784) 38.1,22.809 T1.4@38.1,44.45 44.45,50.8 44.45,71.026 41.141,74.335 41.141,86.169 P4.1@45.677,90.705 ; T2.4@92.71,61.468 92.71,48.3 T4.4@88.86,44.45 88.86,34.711 98.476,25.095 129.231,25.095 131.695,22.631 T3.4@132.697,22.631
GND: C12.2 C16.1 C17.1 C21.2 C22.NEG C23.NEG D1.2 P2.1 P3.10 P3.11 P5.1 Q7.2 Q8.2 R14.1 U7.1 | length 24.7
  BottomLayer (*GBL) w0.254: v1(139.929,40.513) C17.1@141.63,40.513 143.231,40.513 143.535,40.818 U7.1@143.535,42.049 ; v1(142.342,55.702) 142.374,55.735 Q7.2@143.599,55.735 ; v1(142.443,32.055) 142.469,32.029 C12.2@144.399,32.029 ; Q8.2@144.465,49.677 144.465,48.727 v1(144.704,48.489) 144.704,47.142 C16.1@144.805,47.041
  BottomLayer (*GBL) w0.635: C23.NEG@19.591,64.262 19.671,64.182 C21.2@23.655,64.182 ; R14.1@33.909,64.008 v1(33.909,65.608) ; D1.2@69.877,13.228 71.473,11.633 C22.NEG@74.092,11.633 v1(77.267,11.633)
I2C_SCL: U1.6 U2.6 | length 10.9
  TopLayer (*.GTL) w0.254: U1.6@190.985,19.36 190.985,17.582 192.311,16.256 192.311,14.961 193.073,14.199 193.073,13.408 192.311,12.646 U2.6@192.311,9.612
I2C_SDA: U1.3 U2.5 | length 9.7
  TopLayer (*.GTL) w0.254: U1.3@190.985,13.66 v1(190.985,15.159) ; U2.5@193.581,9.612 v1(193.581,15.189)
  BottomLayer (*GBL) w0.254: v1(190.985,15.159) 191.016,15.189 v1(193.581,15.189)
LINE: K1.2 P4.7 | length 16.8
  TopLayer (*.GTL) w1.27: K1.2@58.58,81.788 64.412,81.788 69.248,86.624 69.248,90.502 P4.7@69.451,90.705
NEGV_ON: Q4.1 Q5.1 Q9.1 R3.2 R5.2 TP11.1 | length 173.7
  TopLayer (*.GTL) w0.254: v1(88.773,63.398) 88.773,60.693 92.012,57.455 v1(150.317,57.455) v1(177.165,57.455)
  MidLayer1 (*.G1) w0.254: v1(81.28,86.665) 84.633,83.312 84.691,83.312 88.773,79.23 v1(88.773,63.398)
  BottomLayer (*GBL) w0.254: R5.2@81.229,83.642 81.28,83.693 v1(81.28,86.665) ; Q9.1@150.302,49.677 150.302,57.44 v1(150.317,57.455) ; R3.2@174.422,72.288 175.108,72.288 177.165,70.231 v1(177.165,57.455) ; Q4.1@175.449,74.476 176.38,74.476 TP11.1@184.607,82.702
  BottomLayer (*GBL) w0.635: R5.2@81.229,83.642 82.347,83.642 83.642,84.938 85.166,84.938 86.385,83.718 86.385,81.163 Q5.1@83.718,78.496 ; R3.2@174.422,72.288 175.449,73.316 Q4.1@175.449,74.476
NetC3_1: C3.1 C4.POS D2.1 U4.1 | length 49.7
  TopLayer (*.GTL) w0.635: v2(115.926,70.46) 126.009,70.46 129.398,67.071 135.27,67.071 U4.1@137.77,69.571
  MidLayer1 (*.G1) w0.635: C3.1@137.069,86.563 139.929,83.704 139.929,71.73 U4.1@137.77,69.571
  BottomLayer (*GBL) w0.635: D2.1@114.019,70.378 115.844,70.378 v2(115.926,70.46) ; C3.1@137.069,86.563 137.069,90.054 C4.POS@137.719,90.703
NetC5_pos: C5.POS Q2.3 R1.2 U4.3 | length 18.4
  BottomLayer (*GBL) w0.508: 137.389,74.854 139.878,74.854 R1.2@141.478,76.454
  BottomLayer (*GBL) w0.635: C5.POS@132.309,64.668 132.309,69.19 U4.3@132.69,69.571 133.807,70.688 Q2.3@133.807,73.101 135.636,73.101 137.389,74.854 ; R1.2@141.478,76.454 R1.2@141.478,76.733
NetC6_1: C6.1 C7.POS D6.1 U5.1 | length 70.6
  MidLayer1 (*.G1) w0.635: C6.1@157.302,86.893 159.283,84.912 159.283,75.844 156.972,73.533 U5.1@156.972,69.799 156.972,31.166 v2(161.214,26.924)
  BottomLayer (*GBL) w0.635: C6.1@157.302,86.893 157.302,90.856 C7.POS@157.582,91.135 ; v2(161.214,26.924) 162.438,25.7 D6.1@163.422,25.7
NetC8_pos: C8.POS Q3.3 R2.2 U5.3 | length 18.6
  BottomLayer (*GBL) w0.635: C8.POS@151.028,64.668 151.028,68.936 U5.3@151.892,69.799 152.803,70.71 152.803,72.361 155.804,75.362 159.512,75.362 R2.2@161.061,76.911
NetC9_2: C9.2 C10.NEG D6.2 U6.2 | length 68
  MidLayer1 (*.G1) w0.635: v2(163.373,31.267) 163.373,49.53 172.314,58.471 U6.2@172.314,70.231 169.164,73.381 C9.2@169.164,87.554
  BottomLayer (*GBL) w0.635: v2(163.373,31.267) 163.422,31.219 D6.2@163.422,28.25 ; C10.NEG@168.91,91.135 169.164,90.881 C9.2@169.164,87.554
NetC11_neg: C11.NEG Q4.3 R3.1 U6.3 | length 11.2
  BottomLayer (*GBL) w0.635: C11.NEG@169.392,65.1 169.774,65.482 U6.3@169.774,70.231 170.078,70.231 R3.1@172.136,72.288 172.136,73.229 Q4.3@170.889,74.476
NetC12_1: C12.1 R4.2 U7.6 U7.7 | length 7.5
  BottomLayer (*GBL) w0.254: U7.7@144.805,37.149 144.805,35.331 144.399,34.925 C12.1@144.399,34.315 R4.2@146.101,34.315 U7.6@146.101,37.123
NetC13_2: C13.2 C14.NEG D2.2 U8.2 | length 51.6
  TopLayer (*.GTL) w0.635: C13.2@71.12,72.876 81.131,72.876 83.439,75.184 U8.2@86.385,75.184 87.401,74.168 95.504,74.168 96.749,75.413 v1(114.019,75.413)
  BottomLayer (*GBL) w0.635: C14.NEG@67.081,72.161 70.405,72.161 C13.2@71.12,72.876 ; D2.2@114.019,72.928 v1(114.019,75.413)
NetC15_neg: C15.NEG Q5.3 R5.1 U8.3 | length 14.2
  BottomLayer (*GBL) w0.635: R5.1@81.229,81.356 82.169,80.416 82.169,76.86 U8.3@86.385,72.644 86.69,72.339 C15.NEG@89.586,72.339
NetC16_2: C16.2 R7.1 U7.2 | length 4.4
  BottomLayer (*GBL) w0.254: R7.1@143.129,44.755 C16.2@144.805,44.755 U7.2@144.805,42.049
NetC18_1: C18.1 C19.POS D5.1 U9.3 | length 75.5
  TopLayer (*.GTL) w0.635: C18.1@70.358,60.601 70.358,57.912 74.371,53.899 85.155,53.899 U9.3@86.45,55.194 ; v2(86.36,18.364) 86.436,18.288 v2(98.73,18.288)
  BottomLayer (*GBL) w0.635: C19.POS@66.904,60.935 67.238,60.601 C18.1@70.358,60.601 ; v2(86.36,18.364) 86.36,55.104 U9.3@86.45,55.194 ; v2(98.73,18.288) 98.804,18.214 D5.1@100.35,18.214
NetC20_pos: C20.POS Q6.3 R8.2 R9.2 U9.2 | length 26
  TopLayer (*.GTL) w0.635: v2(79.908,67.158) 79.908,64.276 U9.2@86.45,57.734
  BottomLayer (*GBL) w0.635: R8.2@79.858,65.507 79.908,65.557 v2(79.908,67.158) ; Q6.3@83.742,56.354 85.07,56.354 U9.2@86.45,57.734 86.501,57.683 C20.POS@91.796,57.683 95.326,57.683 R9.2@95.352,57.709
NetC21_1: C21.1 C22.POS D1.1 U10.3 | length 91.4
  TopLayer (*.GTL) w0.635: C21.1@23.655,59.182 39.149,59.182 U10.3@39.403,58.928 ; v2(41.326,19.025) 66.599,19.025 v2(68.097,17.526)
  BottomLayer (*GBL) w0.635: U10.3@39.403,58.928 41.326,57.005 v2(41.326,19.025) ; v2(68.097,17.526) 68.13,17.526 D1.1@69.877,15.778 71.574,17.475 C22.POS@74.092,17.475
NetC23_pos: C23.POS F1.1 R13.2 U10.2 | length 26.9
  TopLayer (*.GTL) w2.54: v2(6.655,41.148) 6.706,41.097 F1.1@6.706,37.057
  BottomLayer (*GBL) w0.635: C23.POS@19.591,58.42 19.591,58.809 22.403,61.62 R13.2@33.945,61.62 35.723,59.842 36.855,59.842 38.481,61.468 U10.2@39.403,61.468
NetC25_pos: C25.POS F7.1 FER3.4 | length 24
  BottomLayer (*GBL) w2.54: F7.1@167.03,22.02 167.03,35.197 C25.POS@170.06,38.227 170.06,44.24 FER3.4@169.723,44.577
NetD1_3: D1.3 T1.5 T1.7 | length 25.5
  TopLayer (*.GTL) w1.27: T1.7@45.72,8.636 49.301,12.217 59.919,12.217 T1.5@63.5,8.636
  BottomLayer (*GBL) w0.635: T1.5@63.5,8.636 63.777,8.913 D1.3@63.777,13.228
NetD1_4: D1.4 T1.6 T1.8 | length 32.5
  TopLayer (*.GTL) w1.27: T1.8@38.1,8.636 40.85,5.886 53.13,5.886 T1.6@55.88,8.636
  BottomLayer (*GBL) w0.635: T1.6@55.88,8.636 55.88,11.328 60.33,15.778 D1.4@63.777,15.778
NetD2_3: D2.3 T2.5 | length 11.9
  BottomLayer (*GBL) w0.635: D2.3@120.119,72.928 120.119,78.717 T2.5@124.46,83.058
NetD2_4: D2.4 T2.8 | length 10.7
  BottomLayer (*GBL) w0.635: D2.4@120.119,70.378 120.119,65.809 T2.8@124.46,61.468
NetD5_3: D5.3 T4.5 | length 12.8
  BottomLayer (*GBL) w0.635: D5.3@102.9,12.114 110.782,12.114 T4.5@114.26,8.636
NetD5_4: D5.4 T4.8 | length 12.9
  BottomLayer (*GBL) w0.635: T4.8@88.86,8.636 92.338,12.114 D5.4@100.35,12.114
NetD6_3: D6.3 T3.5 | length 23.2
  BottomLayer (*GBL) w0.635: D6.3@169.522,28.25 169.522,31.777 175.565,37.821 175.565,45.804 T3.5@173.337,48.031
NetD6_4: D6.4 T3.8 | length 5.1
  BottomLayer (*GBL) w0.635: D6.4@169.522,25.7 172.59,22.631 T3.8@173.337,22.631
NetF2_1: F2.1 Q2.2 | length 12.3
  BottomLayer (*GBL) w2.54: v2(7.62,47.46) 8.687,46.393 8.687,40.306 8.331,39.951 F2.1@8.331,35.761
NetF3_1: F3.1 Q5.2 | length 6.1
  TopLayer (*.GTL) w2.54: F3.1@18.321,36.955 18.321,42.915 v2(18.421,43.015)
NetF4_1: F4.1 Q6.2 | length 6.5
  BottomLayer (*GBL) w1.27: F4.1@16.688,8.585 18.999,8.585 18.999,4.496 v2(19.05,4.445)
NetF5_1: F5.1 Q3.2 | length 5
  BottomLayer (*GBL) w2.54: F5.1@29.335,24.765 29.383,24.717 v2(34.29,24.717)
NetF6_1: F6.1 Q4.2 | length 4
  BottomLayer (*GBL) w2.54: F6.1@31.24,17.382 32.112,16.51 v2(34.925,16.51)
NetFER3_1: FER3.1 P1.13 P1.14 | length 4.5
  BottomLayer (*GBL) w2.54: FER3.1@155.499,44.577 v2(160.02,44.577)
NetFER3_2: FER3.2 P1.5 P1.12 P1.15 P1.16 | length 4.5
  BottomLayer (*GBL) w2.54: FER3.2@155.499,51.079 v2(160.02,51.079)
NetP1_2: P1.2 U1.2 | length 46.6
  TopLayer (*.GTL) w0.178: v1(196.167,15.844) 196.167,20.909
  TopLayer (*.GTL) w0.254: U1.2@190.335,13.66 v1(190.335,15.844) ; 196.167,20.909 190.076,27 190.076,43.663 191.219,44.806 194.116,44.806 P1.2@196.77,47.46
  BottomLayer (*GBL) w0.254: v1(190.335,15.844) v1(196.167,15.844)
NetP1_3: P1.3 U1.5 | length 31.7
  TopLayer (*.GTL) w0.254: U1.5@191.635,19.36 191.635,24.12 189.492,26.264 189.492,44.044 191.016,45.568 192.338,45.568 P1.3@194.23,47.46
NetQ1_3: Q1.3 U3.2 | length 4.5
  TopLayer (*.GTL) w0.254: Q1.3@179.408,58.674 179.408,57.226 U3.2@181.592,55.042
NetQ6_1: Q6.1 R8.1 R10.2 | length 5.2
  BottomLayer (*GBL) w0.203: R8.1@79.858,63.221 82.067,63.221 R10.2@82.092,63.195 83.742,61.545 Q6.1@83.742,60.914
NetQ7_2: Q7.1 Q8.3 R11.1 | length 3.5
  BottomLayer (*GBL) w0.254: Q8.3@145.415,52.177 Q7.1@145.415,55.651
NetR9_1: R9.1 R12.2 U9.1 | length 11.7
  BottomLayer (*GBL) w0.635: U9.1@86.45,60.274 87.263,59.461 94.818,59.461 R9.1@95.352,59.995 95.377,60.02 R12.2@95.377,62.23
NetR13_1: R13.1 R14.2 U10.1 | length 5.6
  BottomLayer (*GBL) w0.254: R13.1@36.231,61.62 36.231,63.972 R14.2@36.195,64.008 U10.1@39.403,64.008
NetS1_2: S1.2 U2.7 | length 10.1
  TopLayer (*.GTL) w0.254: U2.7@191.041,9.612 191.092,9.663 v1(191.092,11.303) ; v1(197.34,11.278) 197.346,11.272 S1.2@197.346,9.144
  BottomLayer (*GBL) w0.254: v1(191.092,11.303) 191.117,11.278 v1(197.34,11.278)
NetT4_6: T4.6 T4.7 | length 10.2
  TopLayer (*.GTL) w1.27: T4.7@96.48,8.636 T4.6@106.64,8.636
NEUT: K1.1 P4.5 | length 19.3
  TopLayer (*.GTL) w1.27: P4.5@61.526,89.841 P4.5@61.526,90.705
  BottomLayer (*GBL) w1.27: K1.1@48.42,81.788 53.589,81.788 57.272,85.471 59.157,85.471 61.526,87.841 P4.5@61.526,90.705